# EAGLE board Elma (EAGLE 3.55)

No outline drawn. Coordinates in mm, seen from the top.
Copper layers used: 

## Footprints (pad centres in the part's own frame; a part is rotated, then mirrored left to right if it is on the bottom)
-1103 = drill 1.27 pad 1.93 round:  11.8,-2.6;  10.7,-5.6;  8.9,-8.2;  6.5,-10.2;  3.6,-11.5;  0.5,-12;  -2.6,-11.7;  -5.6,-10.7;  -8.1,-8.9;  -10.2,-6.5;  -11.5,-3.6;  -11.8,2.6;  -10.7,5.6;  -8.9,8.2;  -6.5,10.2;  -3.6,11.5;  -0.5,12.1;  2.6,11.8;  5.6,10.7;  8.2,8.9;  10.2,6.5;  11.5,3.6;  7.1,-0.3;  -7.1,0.3 | drill 1.27 pad 1.93 octagon:  5.1,5.1
-1124 = drill 1.27 pad 1.93 round:  11.8,-2.6;  8.9,-8.2;  3.6,-11.5;  -2.6,-11.7;  -8.1,-8.9;  -11.5,-3.6;  -11.8,2.6;  -8.9,8.2;  -3.6,11.5;  2.6,11.8;  8.2,8.9;  11.5,3.6 | drill 1.27 pad 1.93 octagon:  5.1,5.1
-1133 = drill 1.27 pad 1.93 round:  11.8,-2.6;  10.7,-5.6;  8.9,-8.2;  6.5,-10.2;  3.6,-11.5;  0.5,-12;  -2.6,-11.7;  -5.6,-10.7;  -8.1,-8.9;  -10.2,-6.5;  -11.5,-3.6;  -11.8,2.6;  -10.7,5.6;  -8.9,8.2;  -6.5,10.2;  -3.6,11.5;  -0.5,12.1;  2.6,11.8;  5.6,10.7;  8.2,8.9;  10.2,6.5;  11.5,3.6;  -7.1,0.3 | drill 1.27 pad 1.93 octagon:  5.1,5.1
-1213 = drill 1.27 pad 1.93 round:  11.8,-2.6;  10.7,-5.6;  8.9,-8.2;  6.5,-10.2;  3.6,-11.5;  0.5,-12;  -2.6,-11.7;  -5.6,-10.7;  -8.1,-8.9;  -10.2,-6.5;  -11.5,-3.6;  -11.8,2.6;  -10.7,5.6;  -8.9,8.2;  -6.5,10.2;  -3.6,11.5;  -0.5,12.1;  2.6,11.8;  5.6,10.7;  8.2,8.9;  10.2,6.5;  11.5,3.6 | drill 1.27 pad 1.93 octagon:  7.17,2.09;  -7.23,-2.12
-1264 = drill 1.27 pad 1.93 round:  11.8,-2.6;  8.9,-8.2;  3.6,-11.5;  -2.6,-11.7;  -8.1,-8.9;  -11.5,-3.6;  -11.8,2.6;  -8.9,8.2;  -3.6,11.5;  2.6,11.8;  8.2,8.9;  11.5,3.6 | drill 1.27 pad 1.93 octagon:  7.17,2.09;  -7.23,-2.12
-BCD-F = drill 1.016 pad 1.676 octagon:  -2.54,2.54;  0,2.54;  2.54,2.54;  -2.54,-2.54;  0,-2.54;  2.54,-2.54
-BCD-H = drill 1.016 pad 1.676 octagon:  -2.54,2.54;  0,2.54;  2.54,2.54;  -2.54,-2.54;  0,-2.54;  2.54,-2.54
-BCD-V = drill 0.914 pad 1.6 octagon:  2.54,-6.35;  -2.54,6.35;  -2.54,-6.35;  2.54,6.35;  0,6.35;  0,-6.35
-HEX-F = drill 1.016 pad 1.676 octagon:  -2.54,2.54;  0,2.54;  2.54,2.54;  -2.54,-2.54;  0,-2.54;  2.54,-2.54
-HEX-H = drill 1.016 pad 1.676 octagon:  -2.54,2.54;  0,2.54;  2.54,2.54;  -2.54,-2.54;  0,-2.54;  2.54,-2.54
-HEX-V = drill 0.914 pad 1.6 octagon:  2.54,-6.35;  -2.54,6.35;  -2.54,-6.35;  2.54,6.35;  0,6.35;  0,-6.35
-RH = drill 1.016 pad 1.676 octagon:  -2.54,2.54;  0,2.54;  2.54,2.54;  -2.54,-2.54;  0,-2.54;  2.54,-2.54
-RH-F = drill 1.016 pad 1.676 octagon:  -2.54,2.54;  0,2.54;  2.54,2.54;  -2.54,-2.54;  0,-2.54;  2.54,-2.54
-RV = drill 0.914 pad 1.6 octagon:  2.54,-6.35;  -2.54,6.35;  -2.54,-6.35;  2.54,6.35;  0,6.35;  0,-6.35
-1X12 = drill 1.016 pad 1.676 round: 1 2.533,-13.967; 2 2.533,-11.428; 3 2.533,-8.887; 4 2.533,-6.348; 5 2.533,-3.808; 6 2.533,-1.268; 7 2.533,1.272; 8 2.533,3.812; 9 2.533,6.353; 10 2.533,8.893; 11 2.533,11.432; 12 2.533,13.973;  7.613,1.272;  7.613,-1.268;  7.613,-3.808;  7.613,3.812;  7.613,6.353;  7.613,-6.348;  7.613,8.893;  7.613,-8.887;  7.613,11.432;  7.613,-11.428;  7.613,13.973;  7.613,-13.967 | drill 2.184 pad 3.81 octagon:  -5.087,11.306;  -5.087,-11.3
-2X12 = drill 1.016 pad 1.676 round: 0 7.613,8.893; 0 17.773,8.893; 1 7.613,11.432; 1 17.773,11.432; 1/1 2.533,-13.967; 1/2 2.533,-11.428; 1/3 2.533,-8.887; 1/4 2.533,-6.348; 1/5 2.533,-3.808; 1/6 2.533,-1.268; 1/7 2.533,1.272; 1/8 2.533,3.812; 1/9 2.533,6.353; 1/10 2.533,8.893; 1/11 2.533,11.432; 1/12 2.533,13.973; 2 7.613,13.973; 2 17.773,13.973; 2/1 12.693,-13.967; 2/2 12.693,-11.428; 2/3 12.693,-8.887; 2/4 12.693,-6.348; 2/5 12.693,-3.808; 2/6 12.693,-1.268; 2/7 12.693,1.272; 2/8 12.693,3.812; 2/9 12.693,6.353; 2/10 12.693,8.893; 2/11 12.693,11.432; 2/12 12.693,13.973;  7.613,1.272;  7.613,-1.268;  7.613,-3.808;  7.613,3.812;  7.613,6.353;  7.613,-6.348;  7.613,-8.887;  7.613,-11.428;  7.613,-13.967;  17.773,-13.967;  17.773,-11.428;  17.773,-8.887;  17.773,-6.348;  17.773,-3.808;  17.773,-1.268;  17.773,1.272;  17.773,3.812;  17.773,6.353 | drill 2.184 pad 3.81 octagon:  -5.087,11.306;  -5.087,-11.3
-3X12 = drill 1.016 pad 1.676 round: 0 7.613,8.893; 0 17.773,8.893; 0 27.933,8.893; 1 7.613,11.432; 1 17.773,11.432; 1 27.933,11.432; 1/1 2.533,-13.967; 1/2 2.533,-11.428; 1/3 2.533,-8.887; 1/4 2.533,-6.348; 1/5 2.533,-3.808; 1/6 2.533,-1.268; 1/7 2.533,1.272; 1/8 2.533,3.812; 1/9 2.533,6.353; 1/10 2.533,8.893; 1/11 2.533,11.432; 1/12 2.533,13.973; 2 7.613,13.973; 2 17.773,13.973; 2 27.933,13.973; 2/1 12.693,-13.967; 2/2 12.693,-11.428; 2/3 12.693,-8.887; 2/4 12.693,-6.348; 2/5 12.693,-3.808; 2/6 12.693,-1.268; 2/7 12.693,1.272; 2/8 12.693,3.812; 2/9 12.693,6.353; 2/10 12.693,8.893; 2/11 12.693,11.432; 2/12 12.693,13.973; 3/1 22.853,-13.967; 3/2 22.853,-11.428; 3/3 22.853,-8.887; 3/4 22.853,-6.348; 3/5 22.853,-3.808; 3/6 22.853,-1.268; 3/7 22.853,1.272; 3/8 22.853,3.812; 3/9 22.853,6.353; 3/10 22.853,8.893; 3/11 22.853,11.432; 3/12 22.853,13.973;  7.613,1.272;  7.613,-1.268;  7.613,-3.808;  7.613,3.812;  7.613,6.353;  7.613,-6.348;  7.613,-8.887;  7.613,-11.428;  7.613,-13.967;  17.773,-13.967;  17.773,-11.428;  17.773,-8.887;  17.773,-6.348;  17.773,-3.808;  17.773,-1.268;  17.773,1.272;  17.773,3.812;  17.773,6.353;  27.933,6.353;  27.933,3.812;  27.933,1.272;  27.933,-1.268;  27.933,-3.808;  27.933,-6.348;  27.933,-8.887;  27.933,-11.428;  27.933,-13.967 | drill 2.184 pad 3.81 octagon:  -5.087,11.306;  -5.087,-11.3
-4X12 = drill 1.016 pad 1.676 round: 0 7.613,8.893; 0 17.773,8.893; 0 27.933,8.893; 0 38.093,8.893; 1 7.613,11.432; 1 17.773,11.432; 1 27.933,11.432; 1 38.093,11.432; 1/1 2.533,-13.967; 1/2 2.533,-11.428; 1/3 2.533,-8.887; 1/4 2.533,-6.348; 1/5 2.533,-3.808; 1/6 2.533,-1.268; 1/7 2.533,1.272; 1/8 2.533,3.812; 1/9 2.533,6.353; 1/10 2.533,8.893; 1/11 2.533,11.432; 1/12 2.533,13.973; 2 7.613,13.973; 2 17.773,13.973; 2 27.933,13.973; 2 38.093,13.973; 2/1 12.693,-13.967; 2/2 12.693,-11.428; 2/3 12.693,-8.887; 2/4 12.693,-6.348; 2/5 12.693,-3.808; 2/6 12.693,-1.268; 2/7 12.693,1.272; 2/8 12.693,3.812; 2/9 12.693,6.353; 2/10 12.693,8.893; 2/11 12.693,11.432; 2/12 12.693,13.973; 3/1 22.853,-13.967; 3/2 22.853,-11.428; 3/3 22.853,-8.887; 3/4 22.853,-6.348; 3/5 22.853,-3.808; 3/6 22.853,-1.268; 3/7 22.853,1.272; 3/8 22.853,3.812; 3/9 22.853,6.353; 3/10 22.853,8.893; 3/11 22.853,11.432; 3/12 22.853,13.973; 4/1 33.013,-13.967; 4/2 33.013,-11.428; 4/3 33.013,-8.887; 4/4 33.013,-6.348; 4/5 33.013,-3.808; 4/6 33.013,-1.268; 4/7 33.013,1.272; 4/8 33.013,3.812; 4/9 33.013,6.353; 4/10 33.013,8.893; 4/11 33.013,11.432; 4/12 33.013,13.973;  7.613,1.272;  7.613,-1.268;  7.613,-3.808;  7.613,3.812;  7.613,6.353;  7.613,-6.348;  7.613,-8.887;  7.613,-11.428;  7.613,-13.967;  17.773,-13.967;  17.773,-11.428;  17.773,-8.887;  17.773,-6.348;  17.773,-3.808;  17.773,-1.268;  17.773,1.272;  17.773,3.812;  17.773,6.353;  27.933,6.353;  27.933,3.812;  27.933,1.272;  27.933,-1.268;  27.933,-3.808;  27.933,-6.348;  27.933,-8.887;  27.933,-11.428;  27.933,-13.967;  38.093,-13.967;  38.093,-11.428;  38.093,-8.887;  38.093,-6.348;  38.093,-3.808;  38.093,-1.268;  38.093,1.272;  38.093,3.812;  38.093,6.353 | drill 2.184 pad 3.81 octagon:  -5.087,11.306;  -5.087,-11.3
4-H = drill 1.016 pad 2.54 offset:  0,0;  2.54,0;  -2.54,0;  -2.54,5.08;  2.54,5.08
4-V = drill 1.016 pad 2.54 offset:  0,3.81;  -2.54,3.81;  2.54,3.81;  -2.54,-3.81;  2.54,-3.81
7-H = drill 1.016 pad 1.676 round:  0,5.08;  2.5,5.08;  -2.5,5.08;  -2.5,7.58;  2.5,7.58 | drill 1.93 pad 2.54 octagon:  5.8,6.18;  -5.8,6.18
7-V = drill 1.016 pad 2.54 offset:  -2.5,-7.5;  0,-7.5;  2.5,-7.5;  -2.5,7;  2.5,7 | drill 2.54 pad 5.08 offset:  -4.1,0;  4.1,0

## Placement (x,y rotation side)
04-1103  [-1103]  26.67,234.95 0 top
04-1124  [-1124]  125.73,234.95 0 top
04-1133  [-1133]  59.69,234.95 0 top
04-1213  [-1213]  92.71,234.95 0 top
04-1264  [-1264]  158.75,234.95 0 top
07-BCD-F  [-BCD-F]  91.44,102.87 0 top
07-BCD-H  [-BCD-H]  77.47,102.87 0 top
07-BCD-V  [-BCD-V]  106.68,100.33 0 top
07-HEX-F  [-HEX-F]  147.32,102.87 0 top
07-HEX-H  [-HEX-H]  132.08,102.87 0 top
07-HEX-V  [-HEX-V]  162.56,100.33 0 top
07-RH  [-RH]  22.86,102.87 0 top
07-RH-F  [-RH-F]  36.83,102.87 0 top
07-RV  [-RV]  52.07,100.33 0 top
08-1X12  [-1X12]  29.21,187.96 90 top
08-2X12  [-2X12]  72.39,177.8 90 top
08-3X12  [-3X12]  115.57,167.64 90 top
08-4X12  [-4X12]  160.02,157.48 90 top
C74-H  [4-H]  64.77,64.77 0 top
C74-V  [4-V]  77.47,66.04 0 top
E27-H  [7-H]  22.86,62.23 0 top
E27-V  [7-V]  41.91,62.23 0 top
TQFP1  [-35SC]  0,0 0 top

## Library data of the parts
04-1103 04-1124 04-1133 04-1213 04-1264 07-BCD-F 07-BCD-H 07-BCD-V 07-HEX-F 07-HEX-H 07-HEX-V 07-RH 07-RH-F 07-RV 08-1X12 08-2X12 08-3X12 08-4X12 C74-H C74-V E27-H E27-V = elma
TQFP1 = BLATT